# Altium PCB usb.PcbDoc
Units mm, origin at the board's own origin, x right, y up, seen from the top; angles counter-clockwise.
Board outline 40.26 x 21.21 mm, 2 copper layers (Top Layer, Bottom Layer); 7 components, 6 nets, 24 pads, 0 vias.
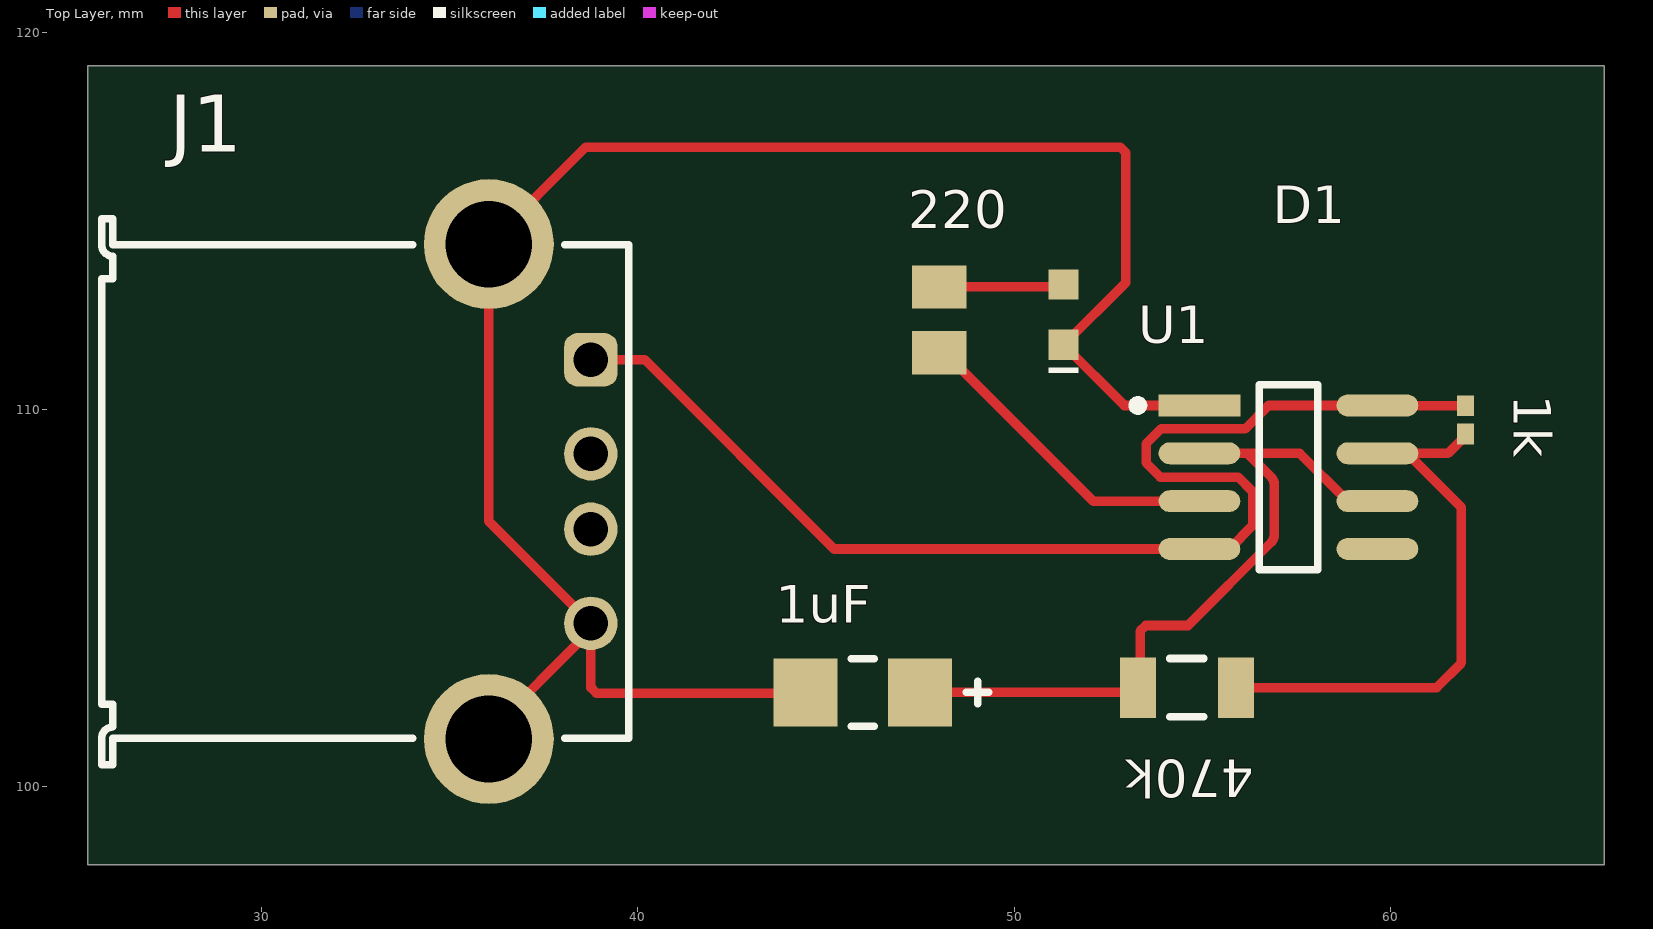
[diagram p0: Top Layer view]
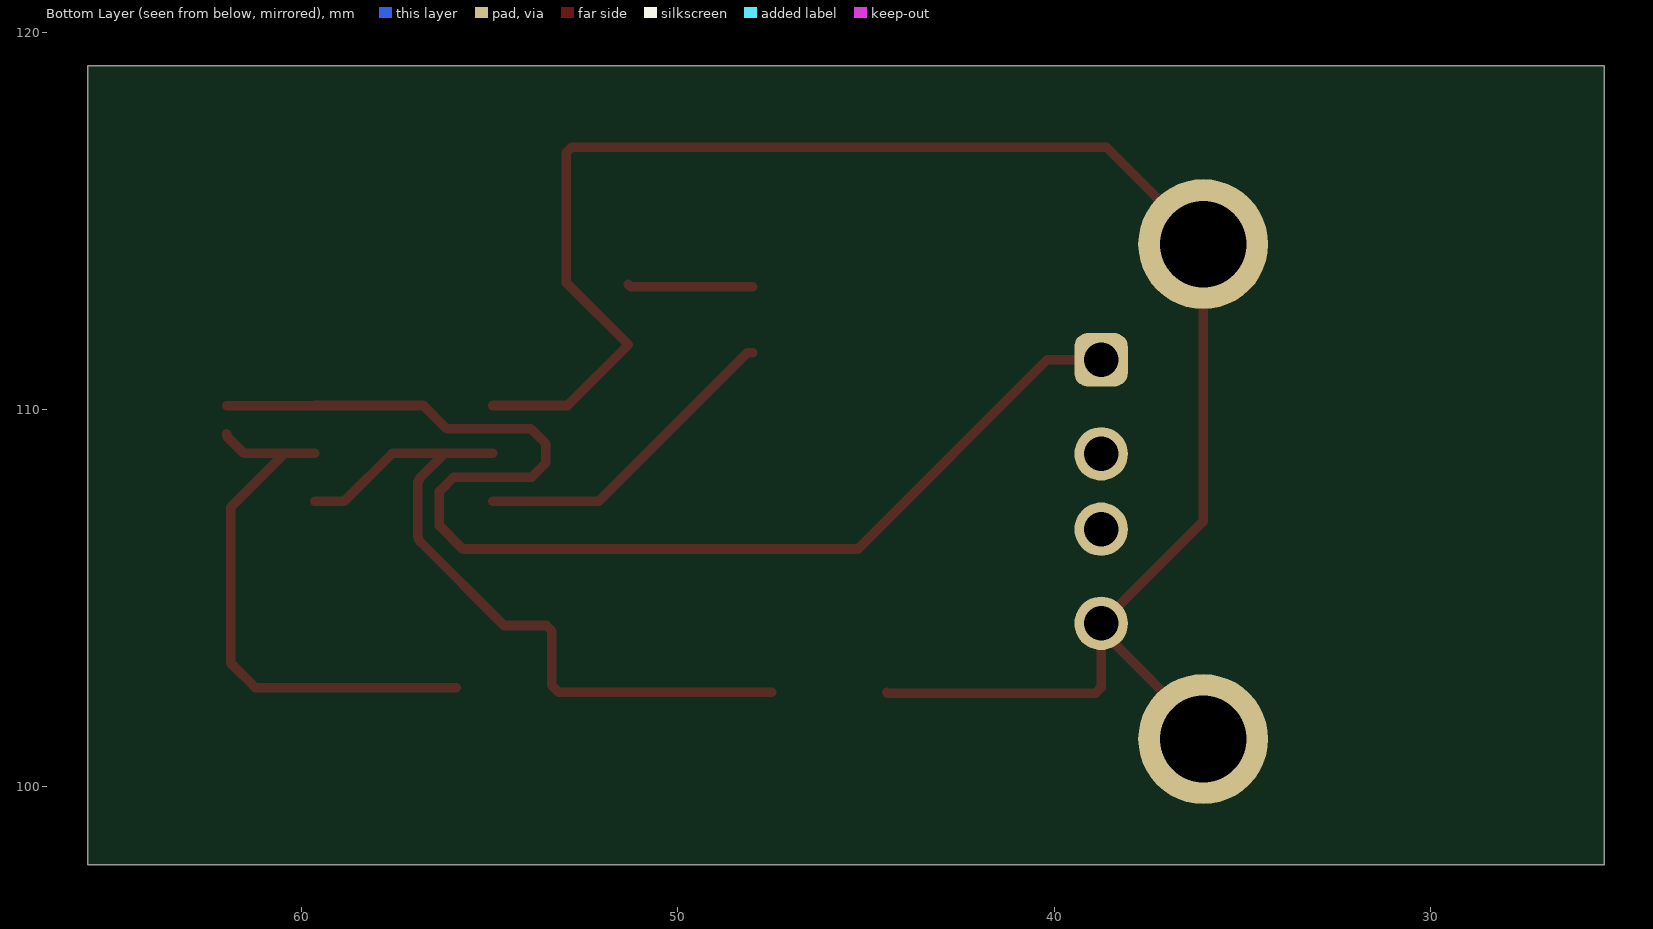
[diagram p1: Bottom Layer view, seen from below]
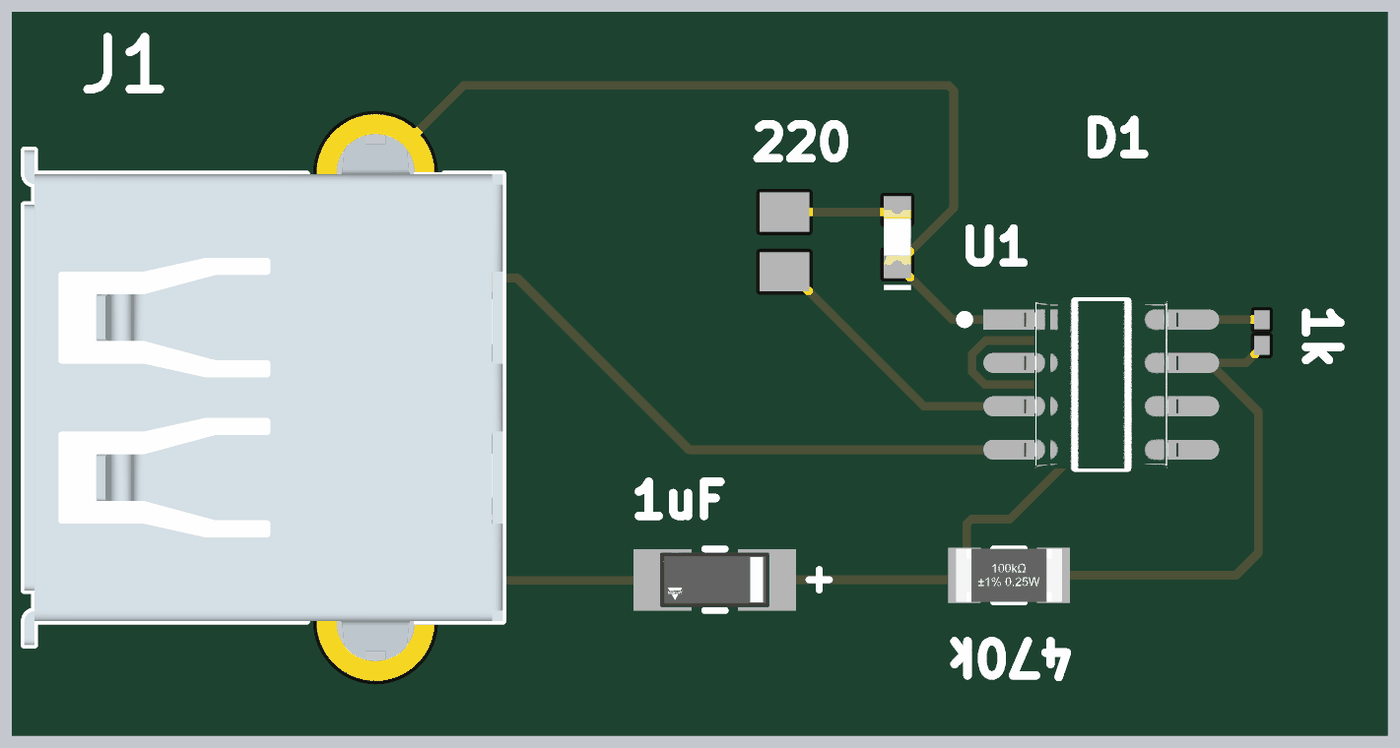
[diagram p2: 3D render of the assembled board from above, using the file's embedded part models]

## Layer stack, top to bottom
Top Solder: solder mask 0.0102, Solder Resist, Dk 3.5
Top Layer: signal copper 0.0356
Dielectric 1: dielectric 0.32, FR-4, Dk 4.8
Bottom Layer: signal copper 0.0356
Bottom Solder: solder mask 0.0102, Solder Resist, Dk 3.5

## Board outline
25.4,97.917 65.659,97.917 65.659,119.126 25.4,119.126

## Design rules (kind name [scope] priority, off if disabled: settings)
Clearance [All] p1: gap=0.2 ignorepadtopadclearanceinfootprint=FALSE
PolygonConnect [All] p1: connectstyle=Relief reliefconductorwidth=0.254 reliefentries=4 polygonreliefangle="90 Angle" airgapwidth=0.254
RoutingVias [All] p1: holewidth=0.711 width=1.27 viastyle="Through Hole" minholewidth=0.711 minwidth=1.27 maxholewidth=0.711 maxwidth=1.27
SilkToSolderMaskClearance [IsPad] p1: minsilkscreentomaskgap=0.1 clearancetoexposedcopper=TRUE
SolderMaskExpansion [All] p1: expansion=0.102 istentingtop=FALSE
Width [All] p1: maxlimit=0.254 minlimit=0.254 preferedwidth=0.254
29 further rules are at their usual default settings.

## Components (designator, comment, footprint, x,y, rotation, side; value= is the part's Value field where it differs from the comment)
1k "MCRE000140" RESC0603X26X15ML03T05 61.976,109.728 r90 top
1uF "293D105X0016A2TE3" FP-293DA-MFG 45.973,102.489 r0 top
220 "ERJ6ENF2200V" RESC2013X70X40NL20T20 48.006,112.381 r90 top
470k "CRGCQ1206J470K" FP-CRGCQ1206-IPC_C 54.579,102.616 r0 top value=470KΩ
D1 "150060RS75000" WL-SMCW_0603_150060xx75000 51.308,112.522 r90 top
J1 "61400416021" 61400416021 32.766,107.823 r270 top
U1 "TLC555CDR" FP-D0008A-IPC_B 57.277,108.204 r0 top

## Footprints (in the part's own frame and the unit in brackets; to place one, negate y for a bottom-side part, rotate by r counter-clockwise, add the part's x,y. Pads: shape width x height; smd on the part's side, far side on the other; paste and mask are expansions set on the pad)
61400416021 [mm] "USB 2.0 Type A Horizontal"
  rrect50% 1.42x1.42 hole 0.92: 1(-3.5,5.99)
  round 1.42 hole 0.92: 2(-1,5.99) 3(1,5.99) 4(3.5,5.99)
  round 3.45 hole 2.3: Shell(-6.57,3.28) Shell(6.57,3.28)
  silkscreen extent -7.25,-7 7.25,7, body extent -8,-7 8,7, height 7.63
FP-293DA-MFG [mm]
  rect 1.7x1.8 smd paste+0 mask+0: 1(-1.525,0) 2(1.525,0)
  silkscreen extent -0.3,-0.9 3.35,0.9, body extent -2.47,-1 2.47,1, height 0.25
FP-CRGCQ1206-IPC_C [mm]
  rect 0.956x1.61 smd paste+0 mask+0: 1(-1.301,0) 2(1.301,0)
  silkscreen extent -0.45,-0.77 0.45,0.77, body extent -1.88,-0.95 1.88,0.95, height 0.25
FP-D0008A-IPC_B [mm]
  rect 2.169x0.582 smd paste+0 mask+0: 1(-2.364,1.905)
  rrect100% 2.169x0.582 smd paste+0 mask+0: 2(-2.364,0.635) 3(-2.364,-0.635) 4(-2.364,-1.905) 5(2.364,-1.905) 6(2.364,-0.635) 7(2.364,0.635) 8(2.364,1.905)
  silkscreen extent -4.12,-2.45 0.78,2.45, body extent -3.7,-2.7 3.7,2.7, height 0.25
RESC0603X26X15ML03T05 [mm] "Chip Resistor, 2-Leads, Body 0.60x0.30mm, IPC Low Density"
  rect 0.55x0.45 smd: 1(-0.375,0) 2(0.375,0)
  body extent -0.32,-0.16 0.32,0.17, height 0.26
RESC2013X70X40NL20T20 [mm] "Chip Resistor, 2-Leads, Body 2.00x1.25mm, IPC Medium Density"
  rect 1.15x1.45 smd: 1(-0.875,0) 2(0.875,0)
  body extent -1.1,-0.72 1.1,0.72, height 0.7
WL-SMCW_0603_150060xx75000 [mm] "SMD Mono-color Chip LED, body 1.6x0.8mm"
  rect 0.8x0.8 smd: 1(-0.8,0) 2(0.8,0)
  silkscreen extent -1.55,-0.4 -1.4,0.4, body extent -0.8,-0.4 0.8,0.4, height 0.7

## Part data
1k: library part CMP-2004-02508-1, Manufacturer=Multicomp, Part Number=MCRE000140
1uF: library part CMP-00030-40940187-1, "293D105X0016A2TE3 Surface Mount Tantalum Capacitor, 1 uF, 16 V, ± 20%, -55 °C, 125 °C, 1206 [3216-18 Metric]", Capacitance=1µF, Case Code (Imperial)=1206, Case Code (Metric)=3216, Dielectric Material=Tantalum, ESR (Equivalent Series Resistance)=9.3Ω, Leakage Current=500nA, Max Operating Temperature=125°C, Min Operating Temperature=-55°C, Ripple Current=90mA, Tolerance=20%, Voltage Rating=16V, Case/Package=1206, Depth=1.6mm, Dissipation Factor=4%, Features="General Purpose", Height=1.8mm, Height - Seated (Max)=1.8034mm, Lead Free="Lead Free", Length=3.2mm, Mount="PCB, Surface Mount", NexarPartId=40940187, Number of Pins=2, Packaging="Tape and Reel", Polarity=Polar, Radiation Hardening=No, REACH SVHC=Unknown, RoHS=Compliant, Schedule B="8532210050, 8532210050", Termination=SMD/SMT, Voltage Rating (DC)=16V, Width=1.6002mm
220: library part CMP-2001-00044-1, Manufacturer=Panasonic, Part Number=ERJ6ENF2200V
470k: library part CMP-03211-000281-1, "CRGCQ1206 470KΩ 0.25W 5% ±100ppm/°C 200V", Ambient Temperature Range High=+70°C, Manufacturer="TE Connectivity", Package=CRGCQ1206, Power Rating=0.25W, Resistance=470KΩ, Temperature="-55°C to +155°C", Temperature Coefficient=±100ppm/°C, Temperature Range High=+155°C, Temperature Range Low=-55°C, Tolerance=0.05, Voltage Rating=200V, Automotive=Yes, Automotive Grade="Grade 1294", Category=Res, ComponentLink2Description=Datasheet, ComponentLink2URL=https://www.te.com/commerce/DocumentDelivery/DDEController?Action=showdoc&DocId=Data+Sheet%7F1773204-3%7F1%7Fpdf%7FEnglish%7FENG_DS_1773204-3_1.pdf%7F4-2176347-1303, Composition="Thick Film", Device Class L1="Passive Components", Device Class L2=Resistors, Device Class L3="Chip SMD Resistors", Height=0.65mm, Ipc Land Pattern Name=RESC310155X55, Lead Free=Yes, Manufacturer Part Number=CRGCQ1206J470K, Octopart=https://octopart.com/crgcq1206j470k-te+connectivity-91018332, RoHS=TRUE, Series=CRGCQ
D1: library part CMP-1426-00001-3, Case Code (Imperial)=0603, Case Code (Metric)=1608, Color=Red, Forward Current=100mA, Forward Voltage=2V, Max Junction Temperature (Tj)=95°C, Max Operating Temperature=85°C, Max Reverse Voltage (DC)=5V, Min Operating Temperature=-40°C, Power Dissipation=72mW, Test Current=20mA, Case/Package=0603, Dominant Wavelength=625nm, Height=700µm, Length=1.6mm, Lens Style="Clear, Rectangular", Luminous Intensity=250mcd, Mount="Surface Mount", NexarPartId=29717776, Packaging="Tape and Reel", Peak Wavelength=630nm, REACH SVHC=Unknown, Reverse Voltage=5V, RoHS=Compliant, Viewing Angle=140°, Wavelength=625nm, Width=800µm
J1: library part CMP-1502-03227-2, Color=White, Contact Resistance=20mΩ, Current Rating=1.5A, Flammability Rating="UL94 V-0", Insulation Resistance=1GΩ, Max Operating Temperature=105°C, Min Operating Temperature=-40°C, Operating Supply Voltage=30V, Connector Type=USB, Contact Material=Copper, Contact Plating=Gold, Gender=Receptacle, Insulation Material=PBT, Lead Free="Lead Free", Length=15.8mm, Mount="Horizontal, Through Hole", NexarPartId=21041530, Number Of Contacts=4, Number of Pins=4, Number of Ports=1, Number of Positions=4, Orientation=Horizontal, REACH SVHC=Unknown, RoHS=Compliant, Termination=Solder, USB Standard="USB 2.0", Voltage Rating=30V, Voltage Rating (DC)=30V, Width=14.4mm
U1: library part CMP-04857-000001-1, "IC OSC SGL TIMER 2.1MHZ 8-SOIC", Case/Package=SOIC, Current Rating=250A, Frequency=2.1MHz, High Level Output Current=-10mA, Low Level Output Current=100mA, Max Operating Temperature=125°C, Max Power Dissipation=725mW, Max Supply Voltage=15V, Min Operating Temperature=-40°C, Min Supply Voltage=2V, Operating Supply Current=360uA, Package Quantity=2500, Quiescent Current=250uA, Height=1.58mm, Lead Free="Lead Free", Length=4.9mm, Mount="Surface Mount", Number of Channels=1, Number of Pins=8, Number of Timers/Counters=1, Packaging="Tape and Reel", Power Dissipation=725mW, Radiation Hardening=No, REACH SVHC="No SVHC", Termination=SMD/SMT, Weight=0.002561oz, Width=3.91mm

## Nets (pads, with @x,y where several pads share a name; then routed paths per layer and width w, separated by ;. In a path a pad name is that pad's centre, name@x,y a point inside that pad or via, vN(x,y) a via of type N, cw(c..) or ccw(c..) an arc to the next point about the centre after c; other vN are vias at no path point)
GND: 1uF.1 D1.1 J1.4 J1.Shell U1.1 | length 50.8
  Top Layer w0.254: J1.Shell@36.046,101.253 36.046,101.433 J1.4@38.756,104.143 ; 1uF.1 44.427,102.468 38.905,102.468 38.756,102.617 J1.4@38.756,104.143 ; U1.1 52.921,110.109 D1.1 52.959,113.373 52.959,116.818 52.81,116.967 38.62,116.967 36.046,114.393 36.046,107.033 J1.4 J1.4@38.756,104.143
Net1k_1: 1k.1 470k.2 U1.7 | length 15
  Top Layer w0.254: 470k.2 61.214,102.616 61.871,103.273 61.871,107.402 U1.7@60.434,108.839 ; U1.7 U1.7@60.434,108.839 ; 1k.1 61.976,109.303 61.512,108.839 U1.7@60.434,108.839
Net1uF_2: 1uF.2 470k.1 U1.2 U1.6 | length 19.7
  Top Layer w0.254: 1uF.2 53.151,102.489 470k.1 53.34,102.678 53.34,104.118 53.489,104.267 54.61,104.267 56.822,106.479 ccw(c56.642,106.658) 56.896,106.658 56.896,107.791 56.896,108.024 ccw(c56.642,108.024) 56.822,108.203 56.186,108.839 ; U1.2 56.186,108.839 ; U1.6 58.847,107.569 57.577,108.839 56.186,108.839
Net220_1: 220.1 U1.3 | length 8.5
  Top Layer w0.254: 220.1 48.156,111.506 52.093,107.569 U1.3
Net220_2: 220.2 D1.2 | length 3.3
  Top Layer w0.254: 220.2 51.242,113.256 D1.2
VCC: 1k.2 J1.1 U1.4 U1.8 | length 33.4
  Top Layer w0.254: J1.1 40.188,111.323 45.212,106.299 U1.4 55.707,106.299 56.325,106.917 56.325,107.825 55.946,108.204 53.881,108.204 53.502,108.583 53.502,109.095 53.898,109.491 56.133,109.491 56.751,110.109 U1.8 59.644,110.106 61.973,110.106 1k.2
pads on no net: J1.2 J1.3 U1.5

## Text inside footprints (layer, text, board x,y; h text height)
J1: Top 3D Body "PCB Edge" at 24.546,110.023 h0.81 r270